# EAGLE board Slew and Hold PANEL v1  (EAGLE 7.7.0)
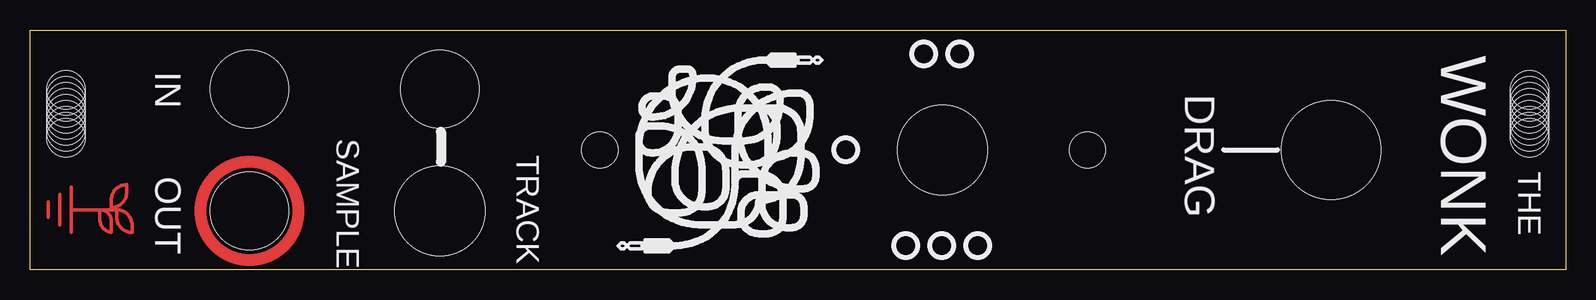
[diagram p0: board, top side]
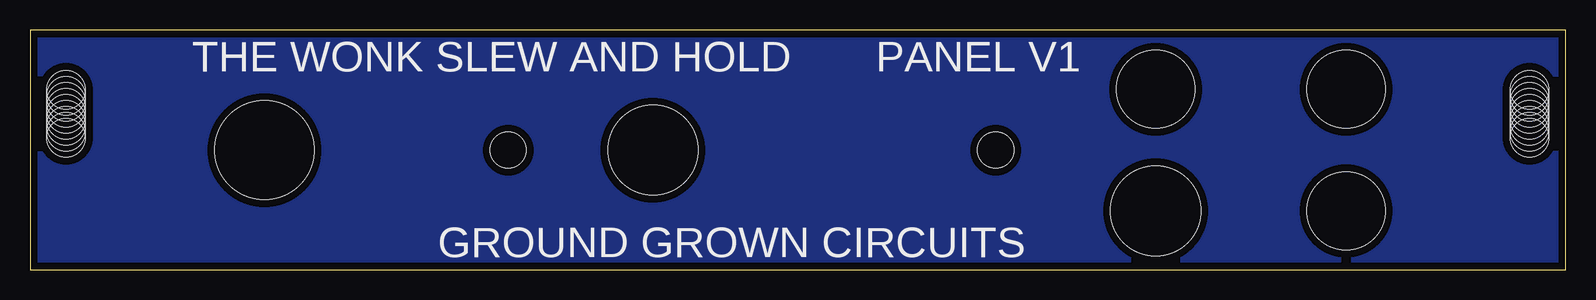
[diagram p1: board, bottom side, seen from below]

Size 128 x 20 mm. Coordinates in mm from the lower left corner, seen from the top.
Outline: 0,0 0,20 128,20 128,0 0,0
Copper layers (1*16): Top 0.035mm / dielectric 1.5mm / Bottom 0.035mm
Design rules "SparkFun": minimum track width 8mil, minimum drill 20mil, track to track 8mil, track to pad 8mil, pad to pad 8mil, via to via 8mil, smd to smd 8mil, copper to edge 8mil, drill to drill 8mil, minimum pad ring 12mil, minimum via ring 10mil, stop-mask expansion 4mil, vias tented up to drill 20mil, thermal gap 10mil

## Footprints (pad centres in the part's own frame; a part is rotated, then mirrored left to right if it is on the bottom)
LED_3MM_DRILL = hole 3: 0,0
MOUNT_DRILL = hole 3.2: 3,9; 3,8.5; 3,8; 3,7.5; 3,7; 3,6.5; 3,6; 3,5.5; 3,5
JACK_DRILL = hole 6.5: 0,0
JACK_DRILL_COPPER_EXS = hole 6.5: 0,0
POT_DRILL = hole 8.25: 0,0
SWITCH_DRILL = hole 7.5: 0,0

## Placement (x,y rotation side)
D4  [LED_3MM_DRILL]  88.14,9.97 270 top
D5  [LED_3MM_DRILL]  47.5,9.97 270 top
E$1  [MOUNT_DRILL]  128,20 180 top
E$2  [MOUNT_DRILL]  0,20 180 bottom
E$3  [LOGO_SMALL_COPPER]  3.5,5 270 top
GATE  [JACK_DRILL]  34.16,15.05 90 top
IN  [JACK_DRILL]  18.29,15.05 270 top
OUT  [JACK_DRILL_COPPER_EXS]  18.29,4.89 270 top
RV1  A500K  [POT_DRILL]  108.46,9.97 180 top
S1  drain  [SWITCH_DRILL]  76.07,9.97 0 top
S2  samp/track  [SWITCH_DRILL]  34.16,4.89 270 top

## Library data of the parts
D4 D5 E$1-E$3 GATE IN OUT S1 S2 = GroundGrownCircuits
RV1 = GroundGrownCircuits; PROD_ID: RES-09177

## Tracks (layer width: path | path; a pad name or v marks a point on that pad's centre or on a via)
S$1
  pour Bottom (isolate 0.61): 0,0 128,0 128,20 0,20

## Text on the board
tPlace: IN | DRAG | WONK | SAMPLE | THE | TRACK | OUT
bPlace: PANEL V1 | THE WONK SLEW AND HOLD | GROUND GROWN CIRCUITS